# EAGLE board Full Bridge (EAGLE 9.4.2)
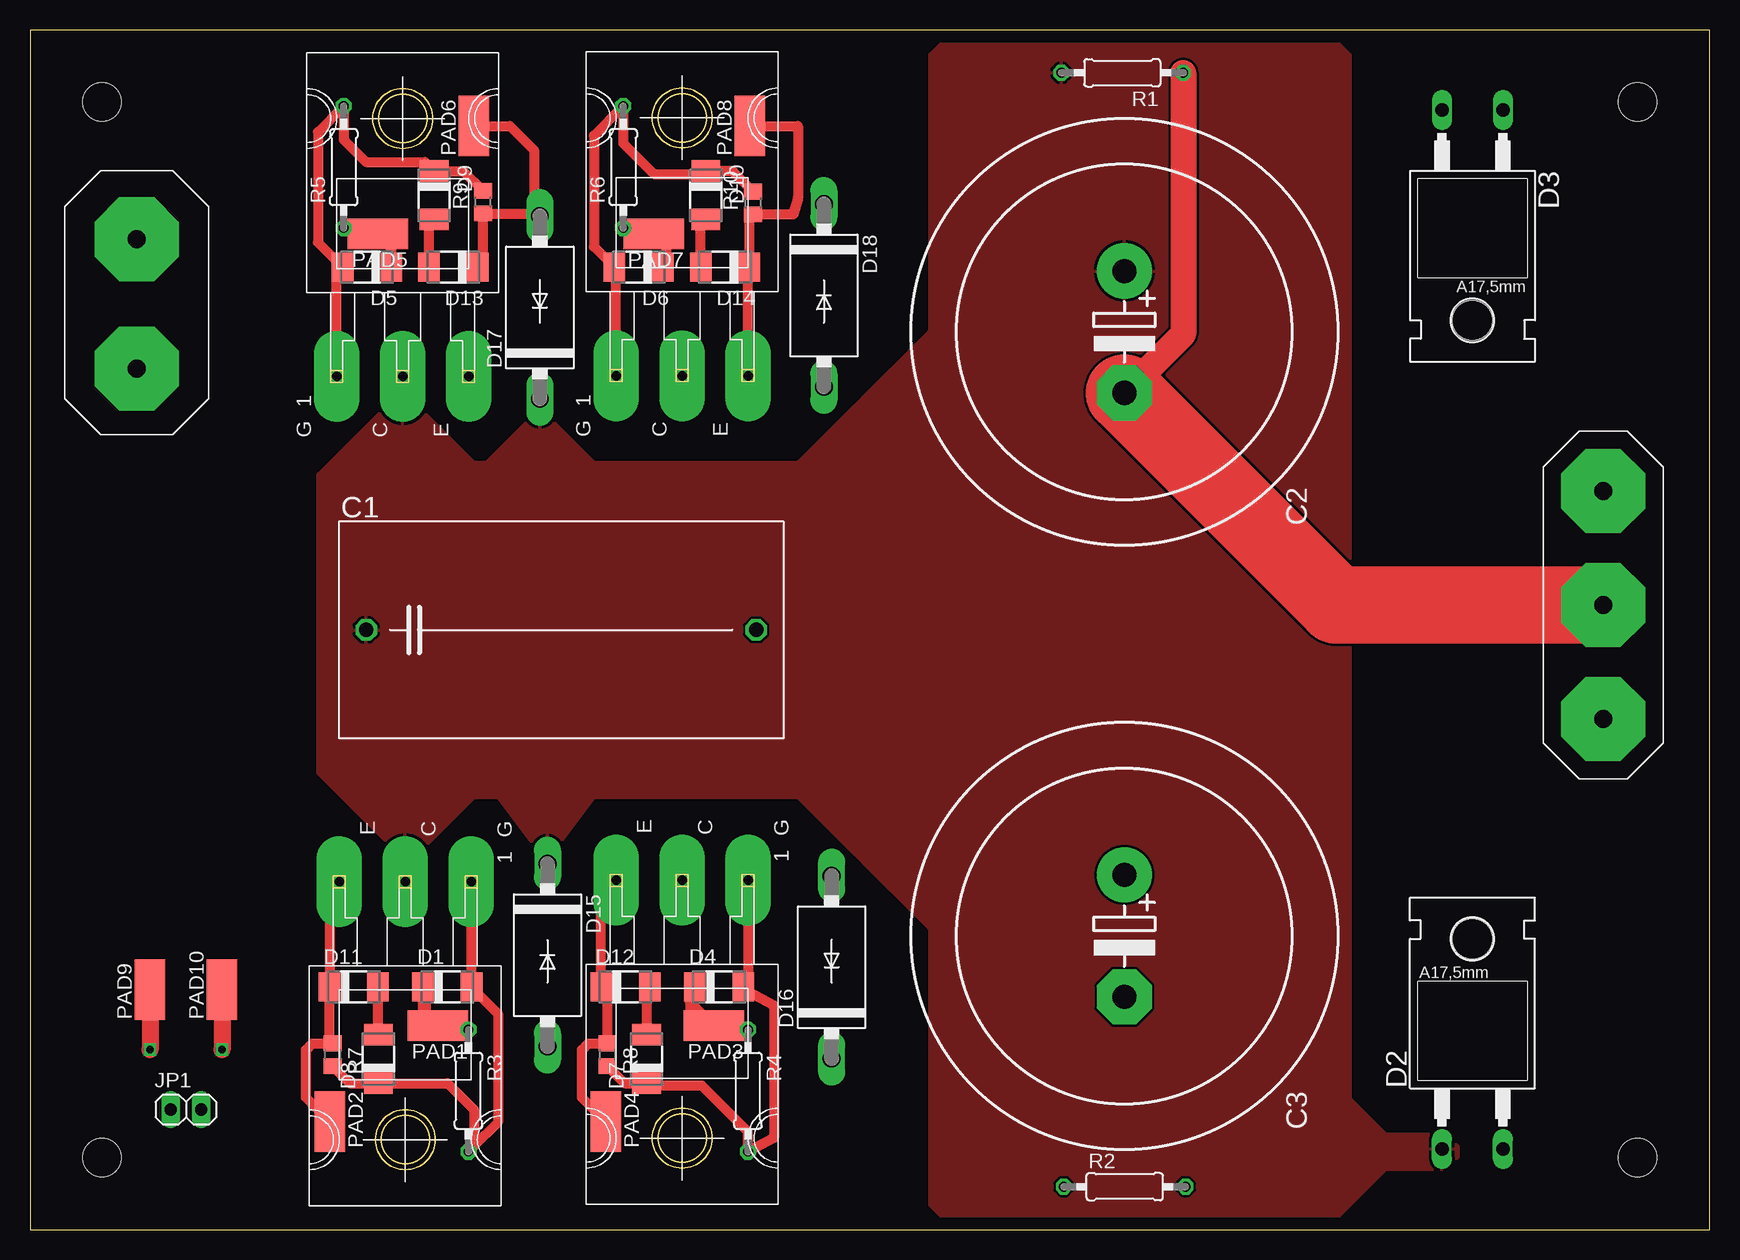
[diagram p0: board, top side]
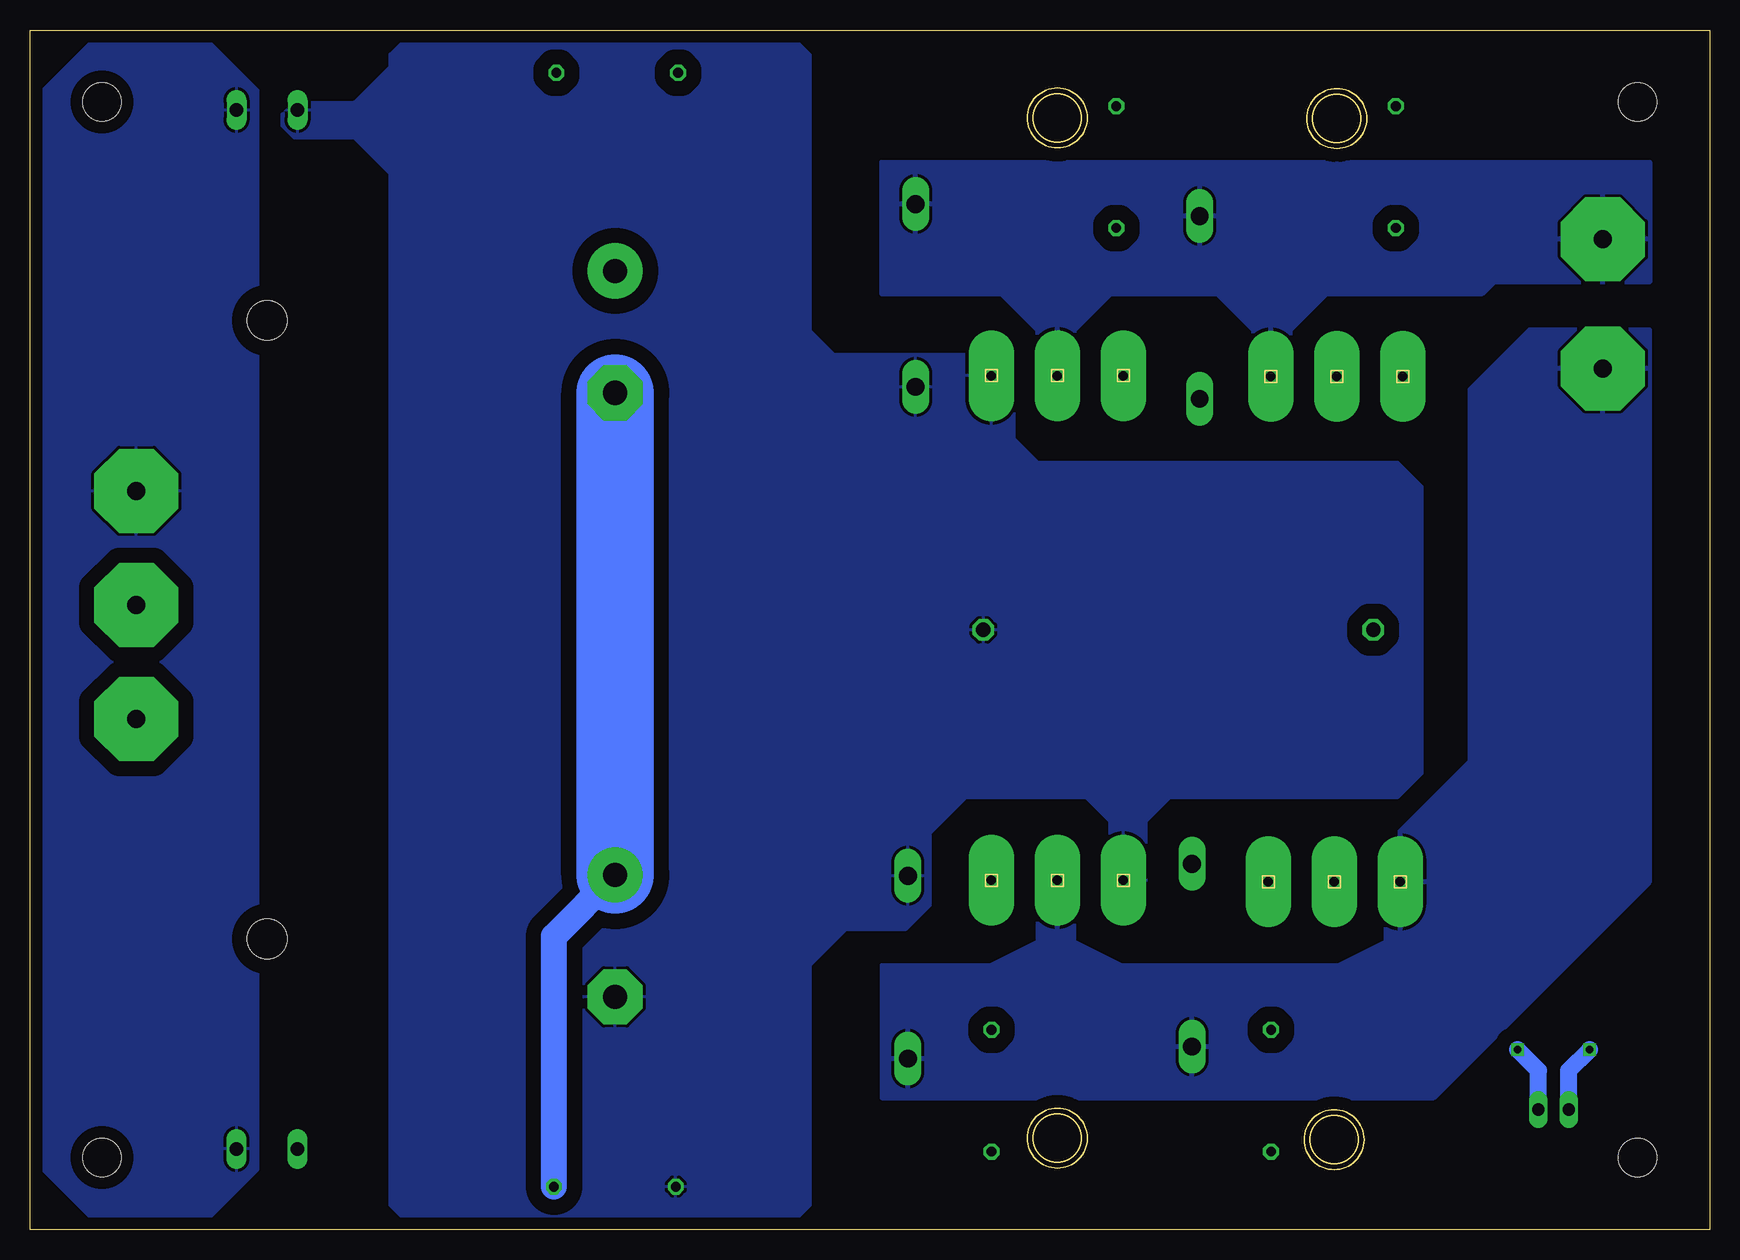
[diagram p1: board, bottom side, seen from below]

Size 140 x 100 mm. Coordinates in mm from the lower left corner, seen from the top.
Outline: 0,0 140,0 140,100 0,100 0,0
Copper layers (1*16): Top 0.035mm / dielectric 1.5mm / Bottom 0.035mm
Design rules "default": minimum track width 10mil, minimum drill 24mil, track to track 8mil, track to pad 8mil, pad to pad 8mil, via to via 8mil, smd to smd 8mil, copper to edge 40mil, drill to drill 8mil, minimum pad ring 10mil, minimum via ring 8mil, stop-mask expansion 4mil, vias tented up to drill 0mil, thermal gap 10mil
Net classes: 1 Power1: width 10.16 mm, clearance 1.27 mm; 2 NEG: width 7.62 mm, clearance 1.27 mm; 3 VCC: width 7.62 mm
Holes 3.2 mm at 6,6 6,94 134,94 134,6

## Footprints (pad centres in the part's own frame; a part is rotated, then mirrored left to right if it is on the bottom)
C325-182X374 = drill 1.194 octagon: 1 -16.256,0; 2 16.256,0
EB35D = drill 2.007 pad 4.597: + -5.08,0 | drill 2.007 pad 4.597 octagon: - 5.08,0
DO-214AC = smd 1.8 x 2.4: A 2.025,0; C -2.025,0
TO220AC = drill 1.118 long: A 2.54,-6.35; C -2.54,-6.35 | hole 3.302: 0,11.176
DO201-15 = drill 1.499 long: A 7.62,0; C -7.62,0
1X02 = drill 1.016 long: 1 -1.27,0; 2 1.27,0
1X03-9.5 = drill 1.5 pad 7 octagon: 1 -9.5,0; 2 0,0; 3 9.5,0
1X02-9.5 = drill 1.5 pad 7 octagon: 1 -9.5,0; 2 1.27,0
SMD2,54-5,08 = smd 2.54 x 5.08: 1 0,0
0207/10 = drill 0.813 octagon: 1 -5.08,0; 2 5.08,0
R0805 = smd 1.3 x 1.5: 1 -0.95,0; 2 0.95,0
TO-247-FLATFIX = drill 0.8 pad 3.81 long: P$1 0,5.5; P$2 0,0; P$3 0,-5.5

## Placement (x,y rotation side)
C1  [C325-182X374]  44.28,49.99 0 top
C2  [EB35D]  91.22,74.83 270 top
C3  [EB35D]  91.22,24.47 270 top
D1  [DO-214AC]  34.79,20.22 0 top
D2  [TO220AC]  120.24,13.06 0 top
D3  [TO220AC]  120.24,86.97 180 top
D4  [DO-214AC]  57.44,20.22 0 top
D5  [DO-214AC]  28.09,80.22 180 top
D6  [DO-214AC]  50.74,80.22 180 top
D7  [DO-214AC]  51.39,14.22 90 top
D8  [DO-214AC]  29.04,14.22 90 top
D9  [DO-214AC]  33.69,86.22 270 top
D10  [DO-214AC]  56.34,86.22 270 top
D11  [DO-214AC]  26.99,20.22 0 top
D12  [DO-214AC]  49.64,20.22 0 top
D13  [DO-214AC]  35.29,80.22 180 top
D14  [DO-214AC]  57.94,80.22 180 top
D15  [DO201-15]  43.14,22.87 270 top
D16  [DO201-15]  66.82,21.87 90 top
D17  [DO201-15]  42.5,76.87 90 top
D18  [DO201-15]  66.18,77.87 270 top
JP1  [1X02]  13,10 0 top
JP5  [1X03-9.5]  131.13,52.07 270 top
JP6  [1X02-9.5]  8.89,81.28 90 top
PAD1  [SMD2,54-5,08]  34,17 90 top
PAD2  [SMD2,54-5,08]  25,9 180 top
PAD3  [SMD2,54-5,08]  57,17 90 top
PAD4  [SMD2,54-5,08]  48,9 180 top
PAD5  [SMD2,54-5,08]  29,83 90 top
PAD6  [SMD2,54-5,08]  37,92 0 top
PAD7  [SMD2,54-5,08]  52,83 90 top
PAD8  [SMD2,54-5,08]  60,92 0 top
PAD9  [SMD2,54-5,08]  10,20 0 top
PAD10  [SMD2,54-5,08]  16,20 0 top
R1  [0207/10]  91.05,96.43 180 top
R2  [0207/10]  91.25,3.57 0 top
R3  [0207/10]  36.55,11.57 270 top
R4  [0207/10]  59.85,11.57 270 top
R5  [0207/10]  26.15,88.57 90 top
R6  [0207/10]  49.45,88.57 90 top
R7  [R0805]  25.21,14.57 270 top
R8  [R0805]  48.13,14.57 270 top
R9  [R0805]  37.76,85.65 90 top
R10  [R0805]  60.29,85.57 90 top
U$1  TO-247B  [TO-247-FLATFIX]  31.29,28.99 270 top
U$2  TO-247B  [TO-247-FLATFIX]  54.36,29.12 270 top
U$3  TO-247B  [TO-247-FLATFIX]  31.07,71.12 90 top
U$4  TO-247B  [TO-247-FLATFIX]  54.36,71.17 90 top

## Library data of the parts
C1 R1-R10 = resistor
C2 C3 = rcl
D1-D18 = diode
JP1 JP5 JP6 = pinhead
PAD1-PAD10 = wirepad
U$1-U$4 = to-247_n-channel_igbt (1)

## Nets
GND: JP5.3
N$1: D1.A D8.C R3.2 R7.2 U$1.P$1
N$2: JP1.1 PAD9.1
N$3: JP1.2 PAD10.1
N$4: D1.C PAD1.1 R3.1
N$5: D4.C PAD3.1 R4.1
N$6: D4.A D7.C R4.2 R8.2 U$2.P$1
N$7: D5.A D9.C R5.2 R9.2 U$3.P$1
N$8: D5.C PAD5.1 R5.1
N$9: D6.A D10.C R6.2 R10.2 U$4.P$1
N$10: D6.C PAD7.1 R6.1
N$12 [VCC]: C1.1 C2.+ D2.C D15.C D17.C R1.2 U$1.P$2 U$3.P$2
N$13 [NEG]: C2.- C3.+ JP5.2 R1.1 R2.2
N$14: D7.A D12.A
N$15 [NEG]: D2.A D3.C JP5.1
N$16: D8.A D11.A
N$17 [Power1]: D11.C D15.A D16.C JP6.1 PAD2.1 R7.1 U$1.P$3 U$2.P$2
N$19 [Power1]: D13.C D17.A D18.C JP6.2 PAD6.1 R9.1 U$3.P$3 U$4.P$2
N$20 [NEG]: C1.2 C3.- D3.A D12.C D14.C D16.A D18.A PAD4.1 PAD8.1 R2.1 R8.1 R10.1 U$2.P$3 U$4.P$3
N$21: D10.A D14.A
N$22: D9.A D13.A

## Tracks (layer width: path | path; a pad name or v marks a point on that pad's centre or on a via)
N$1
  Top 0.813: U$1.P$1 36.79,20.25 D1.A 36.81,20.18 39,18 39,8.94 37.03,6.97 | 37.03,6.97 R3.2 | 30,12.2 D8.C | 30,12.2 34.8,12.2 37,10 37,7 37.03,6.97 | R7.2 26.63,12.2 30,12.2
N$2  (via drill 0.6)
  Top 1.422: PAD9.1 v10,15
  Bottom 1.422: JP1.1 11.73,13.27 v10,15
N$3  (via drill 0.6)
  Top 1.422: PAD10.1 v16,15
  Bottom 1.422: JP1.2 14.27,13.27 v16,15
N$4
  Top 0.813: R3.1 34.35,16.65 33,18 33,19.98 D1.C 32.77,18.23 PAD1.1
N$5
  Top 0.813: R4.1 56.35,16.65 55,18 55,19.8 | 55,19.8 D4.C | PAD3.1 55,19 55,19.8
N$6
  Top 0.813: 59.84,19.84 D4.A | 59.84,19.84 62,18.68 62,7.64 R4.2 59.85,8.15 56,12 51.58,12 D7.C 49.56,12.2 R8.2 | U$2.P$1 59.86,19.86 59.84,19.84
N$7
  Top 0.813: U$3.P$1 25.57,79.72 D5.A 24,82.28 24,91.5 R5.2 26.15,90.85 28,89 32.94,89 D9.C 36.12,88.25 R9.2
N$8
  Top 0.813: R5.1 28.51,83.49 30,82 30,80.33 D5.C 30.12,81.89 PAD5.1
N$9
  Top 0.813: U$4.P$1 48.86,80.08 D6.A 47,81.94 47,91.2 R6.2 49.45,90.55 52,88 56.09,88 D10.C 58.56,88.25 R10.2
N$10
  Top 0.813: 51.51,83.49 R6.1 51.51,83.49 | 51.51,83.49 53,82 53,80.45 D6.C | PAD7.1 51.51,83.49
N$12
  pour Top: 24,38 24,63 30,69 32,69 37,64 38,64 42,68 43,68 47,64 64,64 75,75 75,98 76,99 109,99 110,98 110,11 113,8 118,8 119,7 119,6 118,5 113,5 109,1 76,1 75,2 75,25 64,36 47,36 44,32 42,32 39,36 37,36 32,31 31,31
N$13
  Top 2.184: R1.1 96.13,74.66 C2.-
  Top 6.452: JP5.2 108.9,52.07 C2.-
  Bottom 2.184: R2.2 96.33,24.44 C3.+
  Bottom 6.452: C3.+ C2.-
N$14
  Top 0.813: D12.A 51.39,19.95 D7.A
N$15
  pour Bottom: 125,1 121,5 121,95 125,99 135,99 139,95 139,5 135,1
N$16
  Top 0.813: D8.A 29.04,20.2 D11.A
N$17
  Top 0.813: 25.21,9.21 PAD2.1 23,11 23,15 23.52,15.52 R7.1 24.97,15.77 D11.C 25,20.25 25,27 25.79,27.79 U$1.P$3
  pour Bottom: 5,75 15,75 20,70 20,39 27,32 27,24 31,22 49,22 53,24 53,30 54,31 55,31 56,30 56,24 60,22 69,22 69,11 23,11 5,29
N$19
  Top 0.813: D13.C 37.76,80.67 R9.1 42.29,84.7 D17.A 42,84.99 42,90 40,92 PAD6.1
  pour Bottom: 5,79 18,79 19,78 32,78 35,75 35,70 36,69 37,69 38,70 38,75 41,78 50,78 53,75 53,70 54,69 55,69 56,70 56,75 59,78 69,78 69,85 69,89 5,89
N$20
  Top 0.813: U$2.P$3 47.61,27.88 D12.C 48.13,19.7 R8.1 46.52,15.52 46,15 46,11 PAD4.1 | U$4.P$3 59.86,80.11 D14.C 59.97,84.3 R10.1 63.62,84.62 64,86 64,92 PAD8.1
  pour Bottom: 24,62 24,38 26,36 45,36 47,34 47,29 48,28 49,28 50,29 50,34 52,36 62,36 65,33 65,27 67,25 72,25 75,22 75,2 76,1 109,1 110,2 110,88 113,91 118,91 119,92 119,93 118,94 113,94 110,97 110,98 109,99 76,99 75,98 75,75 73,73 63,73 62,73 58,69 58,66 56,64 26,64
N$21
  Top 0.813: D14.A 55.92,83.77 D10.A
N$22
  Top 0.813: D13.A 33.27,83.77 D9.A